# EAGLE board BlinkyBall-layout (EAGLE 6.2)
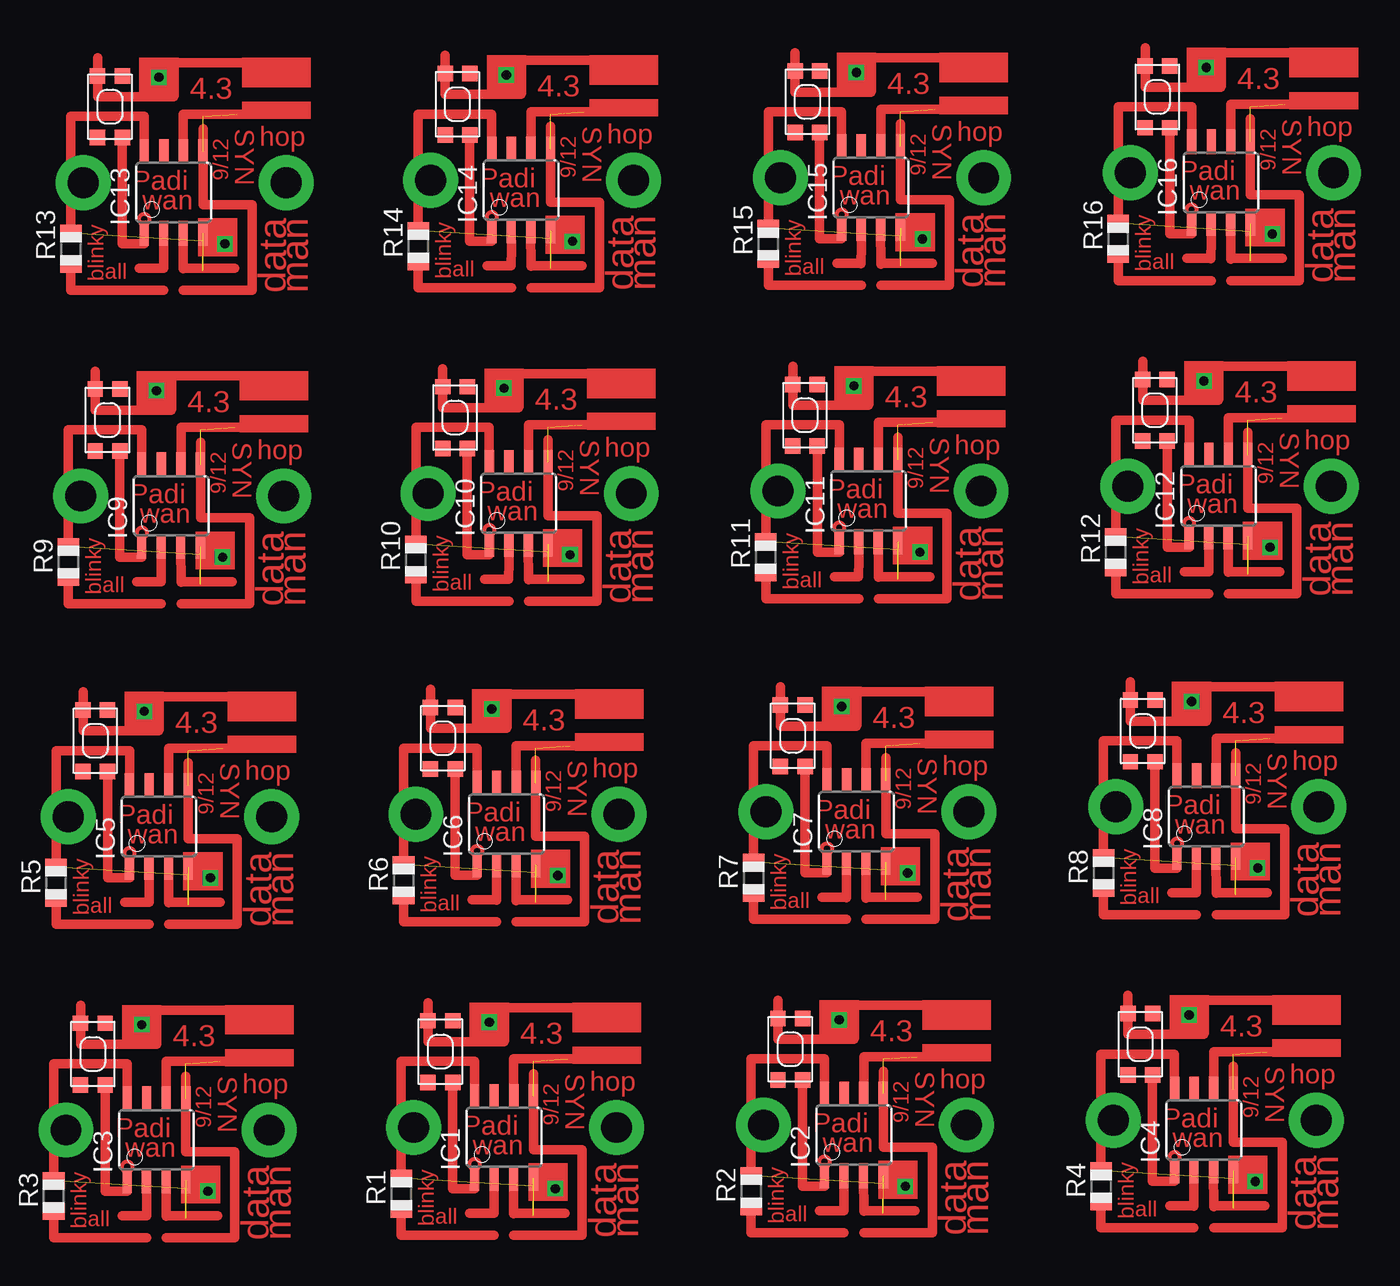
[diagram p0: board, top side]

No outline drawn. Coordinates in mm, seen from the top.
Copper layers (1*16): Top 0.035mm / dielectric 1.5mm / Bottom 0.035mm
Design rules: minimum track width 10mil, minimum drill 24mil, track to track 8mil, track to pad 8mil, pad to pad 8mil, via to via 8mil, smd to smd 8mil, copper to edge 40mil, drill to drill 8mil, minimum pad ring 10mil, minimum via ring 8mil, stop-mask expansion 4mil, vias tented up to drill 0mil, thermal gap 10mil

## Footprints (pad centres in the part's own frame; a part is rotated, then mirrored left to right if it is on the bottom)
KMR2 = smd 1 x 1: 1 2,0.8; 2 2,-0.8; 3 -2,0.8; 4 -2,-0.8
8S1 = smd 0.6 x 1.6: 1 -1.905,-2.654; 2 -0.645,-2.654; 3 0.625,-2.654; 4 1.895,-2.654; 5 1.905,2.654; 6 0.635,2.654; 7 -0.635,2.654; 8 -1.905,2.654
R0805 = smd 1.1 x 1.4: 1 -1,0; 2 1,0

## Placement (x,y rotation side)
E$1  [KMR2]  25.88,13.02 90 top
E$2  [KMR2]  3.33,12.86 90 top
E$3  [KMR2]  48.58,13.18 90 top
E$4  [KMR2]  71.28,13.49 90 top
E$5  [KMR2]  3.49,33.18 90 top
E$6  [KMR2]  26.04,33.34 90 top
E$7  [KMR2]  48.74,33.5 90 top
E$8  [KMR2]  71.44,33.81 90 top
E$9  [KMR2]  4.29,53.98 90 top
E$10  [KMR2]  26.83,54.13 90 top
E$11  [KMR2]  49.53,54.29 90 top
E$12  [KMR2]  72.23,54.61 90 top
E$13  [KMR2]  4.45,74.3 90 top
E$14  [KMR2]  26.99,74.45 90 top
E$15  [KMR2]  49.69,74.61 90 top
E$16  [KMR2]  72.39,74.93 90 top
IC1  TINY13-20SSU  [8S1]  30,7.46 0 top
IC2  TINY13-20SSU  [8S1]  52.7,7.62 0 top
IC3  TINY13-20SSU  [8S1]  7.46,7.3 0 top
IC4  TINY13-20SSU  [8S1]  75.41,7.94 0 top
IC5  TINY13-20SSU  [8S1]  7.62,27.62 0 top
IC6  TINY13-20SSU  [8S1]  30.16,27.78 0 top
IC7  TINY13-20SSU  [8S1]  52.86,27.94 0 top
IC8  TINY13-20SSU  [8S1]  75.56,28.26 0 top
IC9  TINY13-20SSU  [8S1]  8.41,48.42 0 top
IC10  TINY13-20SSU  [8S1]  30.96,48.58 0 top
IC11  TINY13-20SSU  [8S1]  53.66,48.74 0 top
IC12  TINY13-20SSU  [8S1]  76.36,49.05 0 top
IC13  TINY13-20SSU  [8S1]  8.57,68.74 0 top
IC14  TINY13-20SSU  [8S1]  31.11,68.9 0 top
IC15  TINY13-20SSU  [8S1]  53.82,69.06 0 top
IC16  TINY13-20SSU  [8S1]  76.52,69.37 0 top
R1  [R0805]  23.34,3.81 90 top
R2  [R0805]  46.04,3.97 90 top
R3  [R0805]  0.79,3.65 90 top
R4  [R0805]  68.74,4.29 90 top
R5  [R0805]  0.95,23.97 90 top
R6  [R0805]  23.5,24.13 90 top
R7  [R0805]  46.2,24.29 90 top
R8  [R0805]  68.9,24.61 90 top
R9  [R0805]  1.75,44.77 90 top
R10  [R0805]  24.29,44.93 90 top
R11  [R0805]  46.99,45.09 90 top
R12  [R0805]  69.69,45.4 90 top
R13  [R0805]  1.91,65.09 90 top
R14  [R0805]  24.45,65.25 90 top
R15  [R0805]  47.15,65.41 90 top
R16  [R0805]  69.85,65.72 90 top

## Library data of the parts
E$1-E$16 R1-R16 = adafruit
IC1-IC16 = atmel; MPN: ATTINY13-20SSU; OC_FARNELL: 1455133; OC_NEWARK: 58M3771

## Nets
N$1: IC1.5
N$2: IC1.2
N$3: IC1.3
N$4: R1.1
N$5: IC1.4 R1.2
N$6: IC2.5
N$7: IC2.2
N$8: IC2.3
N$9: R2.1
N$10: IC2.4 R2.2
N$11: IC4.5
N$12: IC4.2
N$13: IC4.3
N$14: R4.1
N$16: IC4.4 R4.2
N$17: IC5.5
N$18: IC5.2
N$19: IC5.3
N$20: R5.1
N$21: IC5.4 R5.2
N$22: IC6.5
N$23: IC6.2
N$24: IC6.3
N$25: IC3.5
N$26: IC3.2
N$27: IC3.3
N$28: R3.1
N$29: R6.1
N$30: IC3.4 R3.2
N$31: IC6.4 R6.2
N$32: IC7.5
N$33: IC7.2
N$34: IC7.3
N$35: R7.1
N$36: IC7.4 R7.2
N$37: IC8.5
N$38: IC8.2
N$40: IC8.3
N$41: R8.1
N$42: IC8.4 R8.2
N$43: IC9.5
N$44: IC9.2
N$45: IC9.3
N$46: R9.1
N$47: IC9.4 R9.2
N$48: IC10.5
N$49: IC10.2
N$50: IC10.3
N$51: R10.1
N$52: IC10.4 R10.2
N$53: IC11.5
N$54: IC11.2
N$55: IC11.3
N$56: R11.1
N$57: IC11.4 R11.2
N$58: IC12.5
N$59: IC12.2
N$60: IC12.3
N$61: R12.1
N$62: IC12.4 R12.2
N$63: IC13.5
N$64: IC13.2
N$65: IC13.3
N$66: R13.1
N$67: IC13.4 R13.2
N$68: IC14.5
N$69: IC14.2
N$70: IC14.3
N$71: R14.1
N$72: IC14.4 R14.2
N$73: IC15.5
N$74: IC15.2
N$75: IC15.3
N$76: R15.1
N$77: IC15.4 R15.2
N$78: IC16.5
N$79: IC16.2
N$80: IC16.3
N$81: R16.1
N$82: IC16.4 R16.2

## Tracks (layer width: path | path; a pad name or v marks a point on that pad's centre or on a via)
N$1  (2 unrouted)
N$2
  Top 0.61: IC1.2 29.37,3.65 29.36,2.53
N$3
  Top 0.406: IC1.3 30.63,4.71
  Top 0.61: 30.63,4.71 30.64,2.5
N$4
  Top 0.61: 29.37,1.11 23.34,1.11 R1.1
N$5  (3 unrouted)
  Top 0.406: IC1.4 31.9,4.92
  Top 0.61: 31.9,4.92 31.91,4.92 31.91,3.68
N$6  (2 unrouted)
N$7
  Top 0.61: IC2.2 52.07,3.81 52.06,2.69
N$8
  Top 0.406: IC2.3 53.33,4.87
  Top 0.61: 53.33,4.87 53.34,2.65
N$9
  Top 0.61: 52.07,1.27 46.04,1.27 R2.1
N$10  (3 unrouted)
  Top 0.406: IC2.4 54.6,5.08
  Top 0.61: 54.6,5.08 54.61,5.08 54.61,3.84
N$11  (2 unrouted)
N$12
  Top 0.61: IC4.2 74.77,4.13 74.76,3.01
N$13
  Top 0.406: IC4.3 76.03,5.18
  Top 0.61: 76.03,5.18 76.04,2.97
N$14
  Top 0.61: 74.77,1.59 68.74,1.59 R4.1
N$16  (3 unrouted)
  Top 0.406: IC4.4 77.3,5.4
  Top 0.61: 77.3,5.4 77.31,5.4 77.31,4.16
N$17  (2 unrouted)
N$18
  Top 0.61: IC5.2 6.99,23.81 6.97,22.69
N$19
  Top 0.406: IC5.3 8.24,24.87
  Top 0.61: 8.24,24.87 8.26,22.66
N$20
  Top 0.61: 6.99,21.27 0.95,21.27 R5.1
N$21  (3 unrouted)
  Top 0.406: IC5.4 9.52,25.08
  Top 0.61: 9.52,25.08 9.53,25.08 9.53,23.84
N$22  (2 unrouted)
N$23
  Top 0.61: IC6.2 29.53,23.97 29.52,22.85
N$24
  Top 0.406: IC6.3 30.79,25.03
  Top 0.61: 30.79,25.03 30.8,22.82
N$25  (2 unrouted)
N$26
  Top 0.61: IC3.2 6.83,3.49 6.82,2.37
N$27
  Top 0.406: IC3.3 8.09,4.55
  Top 0.61: 8.09,4.55 8.1,2.34
N$28
  Top 0.61: 6.83,0.95 0.79,0.95 R3.1
N$29
  Top 0.61: 29.53,21.43 23.5,21.43 R6.1
N$30  (3 unrouted)
  Top 0.406: IC3.4 9.36,4.76
  Top 0.61: 9.36,4.76 9.37,4.76 9.37,3.52
N$31  (3 unrouted)
  Top 0.406: IC6.4 32.06,25.24
  Top 0.61: 32.06,25.24 32.07,25.24 32.07,24
N$32  (2 unrouted)
N$33
  Top 0.61: IC7.2 52.23,24.13 52.22,23.01
N$34
  Top 0.406: IC7.3 53.49,25.19
  Top 0.61: 53.49,25.19 53.5,22.98
N$35
  Top 0.61: 52.23,21.59 46.2,21.59 R7.1
N$36  (3 unrouted)
  Top 0.406: IC7.4 54.76,25.4
  Top 0.61: 54.76,25.4 54.77,25.4 54.77,24.16
N$37  (2 unrouted)
N$38
  Top 0.61: IC8.2 74.93,24.45 74.92,23.33
N$40
  Top 0.406: IC8.3 76.19,25.5
  Top 0.61: 76.19,25.5 76.2,23.29
N$41
  Top 0.61: 74.93,21.91 68.9,21.91 R8.1
N$42  (3 unrouted)
  Top 0.406: IC8.4 77.46,25.72
  Top 0.61: 77.46,25.72 77.47,25.72 77.47,24.48
N$43  (2 unrouted)
N$44
  Top 0.61: IC9.2 7.78,44.61 7.77,43.49
N$45
  Top 0.406: IC9.3 9.04,45.67
  Top 0.61: 9.04,45.67 9.05,43.45
N$46
  Top 0.61: 7.78,42.07 1.75,42.07 R9.1
N$47  (3 unrouted)
  Top 0.406: IC9.4 10.31,45.88
  Top 0.61: 10.31,45.88 10.32,45.88 10.32,44.64
N$48  (2 unrouted)
N$49
  Top 0.61: IC10.2 30.32,44.77 30.31,43.65
N$50
  Top 0.406: IC10.3 31.58,45.83
  Top 0.61: 31.58,45.83 31.59,43.61
N$51
  Top 0.61: 30.32,42.23 24.29,42.23 R10.1
N$52  (3 unrouted)
  Top 0.406: IC10.4 32.85,46.04
  Top 0.61: 32.85,46.04 32.86,46.04 32.86,44.8
N$53  (2 unrouted)
N$54
  Top 0.61: IC11.2 53.02,44.93 53.01,43.8
N$55
  Top 0.406: IC11.3 54.28,45.98
  Top 0.61: 54.28,45.98 54.29,43.77
N$56
  Top 0.61: 53.02,42.39 46.99,42.39 R11.1
N$57  (3 unrouted)
  Top 0.406: IC11.4 55.55,46.2
  Top 0.61: 55.55,46.2 55.56,46.2 55.56,44.96
N$58  (2 unrouted)
N$59
  Top 0.61: IC12.2 75.72,45.24 75.71,44.12
N$60
  Top 0.406: IC12.3 76.98,46.3
  Top 0.61: 76.98,46.3 76.99,44.09
N$61
  Top 0.61: 75.72,42.7 69.69,42.7 R12.1
N$62  (3 unrouted)
  Top 0.406: IC12.4 78.25,46.51
  Top 0.61: 78.25,46.51 78.26,46.51 78.26,45.28
N$63  (2 unrouted)
N$64
  Top 0.61: IC13.2 7.94,64.93 7.93,63.81
N$65
  Top 0.406: IC13.3 9.2,65.99
  Top 0.61: 9.2,65.99 9.21,63.77
N$66
  Top 0.61: 7.94,62.39 1.91,62.39 R13.1
N$67  (3 unrouted)
  Top 0.406: IC13.4 10.47,66.2
  Top 0.61: 10.47,66.2 10.48,66.2 10.48,64.96
N$68  (2 unrouted)
N$69
  Top 0.61: IC14.2 30.48,65.09 30.47,63.97
N$70
  Top 0.406: IC14.3 31.74,66.14
  Top 0.61: 31.74,66.14 31.75,63.93
N$71
  Top 0.61: 30.48,62.55 24.45,62.55 R14.1
N$72  (3 unrouted)
  Top 0.406: IC14.4 33.01,66.36
  Top 0.61: 33.01,66.36 33.02,66.36 33.02,65.12
N$73  (2 unrouted)
N$74
  Top 0.61: IC15.2 53.18,65.25 53.17,64.12
N$75
  Top 0.406: IC15.3 54.44,66.3
  Top 0.61: 54.44,66.3 54.45,64.09
N$76
  Top 0.61: 53.18,62.71 47.15,62.71 R15.1
N$77  (3 unrouted)
  Top 0.406: IC15.4 55.71,66.52
  Top 0.61: 55.71,66.52 55.72,66.52 55.72,65.28
N$78  (2 unrouted)
N$79
  Top 0.61: IC16.2 75.88,65.56 75.87,64.44
N$80
  Top 0.406: IC16.3 77.14,66.62
  Top 0.61: 77.14,66.62 77.15,64.41
N$81
  Top 0.61: 75.88,63.02 69.85,63.02 R16.1
N$82  (3 unrouted)
  Top 0.406: IC16.4 78.41,66.83
  Top 0.61: 78.41,66.83 78.42,66.83 78.42,65.6
S$1
  Top 0.61: 7.46,13.49 2.54,13.49 2.54,16.03
S$2
  Top 0.61: 8.1,2.38 11.43,2.38 | 6.83,15.72 12.22,15.72
S$3  (via drill 2 pad 3.56)
  other vias: 14.76,7.94 1.59,7.94
S$4
  Top 0.61: 0.79,9.37 0.79,12.22 5.56,12.22 5.56,9.84
S$5
  Top 0.61: 8.1,12.38 12.38,12.38
S$6
  Top 0.61: 8.1,0.95 9.53,0.95
S$7
  Top 0.61: 4.13,10.79 4.13,3.97 5.56,3.97
S$8
  Top 0.61: 6.67,2.38 5.24,2.38
S$9  (via drill 0.6)
  other vias: 6.51,14.76
S$10
  Top 0.61: 0.79,4.76 0.79,6.51
S$11
  Top 0.61: 9.37,11.43 9.37,6.51 12.54,6.51 12.54,0.95 8.1,0.95
S$12
  Top 0.61: 8.1,10.32 8.1,12.22
S$13
  Top 0.61: 30.64,2.54 33.97,2.54 | 29.37,15.88 34.77,15.88
S$14  (via drill 0.6)
  other vias: 10.79,3.97
S$15  (via drill 2 pad 3.56)
  other vias: 37.31,8.1 24.13,8.1
S$16
  Top 0.61: 23.34,9.53 23.34,12.38 28.1,12.38 28.1,10
S$17
  Top 0.61: 26.67,10.95 26.67,4.13 28.1,4.13
S$18
  Top 0.61: 23.34,4.92 23.34,6.67
S$19
  Top 0.61: 31.91,11.59 31.91,6.67 35.08,6.67 35.08,1.11 30.64,1.11
S$20
  Top 0.61: 30.64,10.48 30.64,12.38
S$21
  Top 0.61: 29.21,2.54 27.78,2.54
S$22
  Top 0.61: 30,13.65 25.08,13.65 25.08,16.19
S$23
  Top 0.61: 30.64,12.54 34.92,12.54
S$24
  Top 0.61: 30.64,1.11 32.07,1.11
S$25  (via drill 0.6)
  other vias: 29.05,14.92
S$26  (via drill 0.6)
  other vias: 33.34,4.13
S$27
  Top 0.61: 53.34,2.7 56.67,2.7 | 52.07,16.03 57.47,16.03
S$28  (via drill 2 pad 3.56)
  other vias: 60.01,8.26 46.83,8.26
S$29
  Top 0.61: 46.04,9.68 46.04,12.54 50.8,12.54 50.8,10.16
S$30
  Top 0.61: 49.37,11.11 49.37,4.29 50.8,4.29
S$31
  Top 0.61: 46.04,5.08 46.04,6.83
S$32
  Top 0.61: 54.61,11.75 54.61,6.83 57.78,6.83 57.78,1.27 53.34,1.27
S$33
  Top 0.61: 53.34,10.64 53.34,12.54
S$34
  Top 0.61: 51.91,2.7 50.48,2.7
S$35
  Top 0.61: 52.7,13.81 47.78,13.81 47.78,16.35
S$36
  Top 0.61: 53.34,12.7 57.63,12.7
S$37
  Top 0.61: 53.34,1.27 54.77,1.27
S$38  (via drill 0.6)
  other vias: 51.75,15.08
S$39  (via drill 0.6)
  other vias: 56.04,4.29
S$40
  Top 0.61: 76.04,3.02 79.38,3.02 | 74.77,16.35 80.17,16.35
S$41  (via drill 2 pad 3.56)
  other vias: 82.71,8.57 69.53,8.57
S$42
  Top 0.61: 68.74,10 68.74,12.86 73.5,12.86 73.5,10.48
S$43
  Top 0.61: 72.07,11.43 72.07,4.6 73.5,4.6
S$44
  Top 0.61: 68.74,5.4 68.74,7.14
S$45
  Top 0.61: 77.31,12.06 77.31,7.14 80.49,7.14 80.49,1.59 76.04,1.59
S$46
  Top 0.61: 76.04,10.95 76.04,12.86
S$47
  Top 0.61: 74.61,3.02 73.18,3.02
S$48
  Top 0.61: 75.41,14.13 70.48,14.13 70.48,16.67
S$49
  Top 0.61: 76.04,13.02 80.33,13.02
S$50
  Top 0.61: 76.04,1.59 77.47,1.59
S$51  (via drill 0.6)
  other vias: 74.45,15.4
S$52  (via drill 0.6)
  other vias: 78.74,4.6
S$53
  Top 0.61: 8.26,22.7 11.59,22.7 | 6.99,36.04 12.38,36.04
S$54  (via drill 2 pad 3.56)
  other vias: 14.92,28.26 1.75,28.26
S$55
  Top 0.61: 0.95,29.69 0.95,32.54 5.71,32.54 5.71,30.16
S$56
  Top 0.61: 4.29,31.11 4.29,24.29 5.71,24.29
S$57
  Top 0.61: 0.95,25.08 0.95,26.83
S$58
  Top 0.61: 9.53,31.75 9.53,26.83 12.7,26.83 12.7,21.27 8.26,21.27
S$59
  Top 0.61: 8.26,30.64 8.26,32.54
S$60
  Top 0.61: 6.83,22.7 5.4,22.7
S$61
  Top 0.61: 7.62,33.81 2.7,33.81 2.7,36.35
S$62
  Top 0.61: 8.26,32.7 12.54,32.7
S$63
  Top 0.61: 8.26,21.27 9.68,21.27
S$64  (via drill 0.6)
  other vias: 6.67,35.08
S$65  (via drill 0.6)
  other vias: 10.95,24.29
S$66
  Top 0.61: 30.8,22.86 34.13,22.86 | 29.53,36.2 34.92,36.2
S$67  (via drill 2 pad 3.56)
  other vias: 37.47,28.42 24.29,28.42
S$68
  Top 0.61: 23.5,29.84 23.5,32.7 28.26,32.7 28.26,30.32
S$69
  Top 0.61: 26.83,31.27 26.83,24.45 28.26,24.45
S$70
  Top 0.61: 23.5,25.24 23.5,26.99
S$71
  Top 0.61: 32.07,31.91 32.07,26.99 35.24,26.99 35.24,21.43 30.8,21.43
S$72
  Top 0.61: 30.8,30.8 30.8,32.7
S$73
  Top 0.61: 29.37,22.86 27.94,22.86
S$74
  Top 0.61: 30.16,33.97 25.24,33.97 25.24,36.51
S$75
  Top 0.61: 30.8,32.86 35.08,32.86
S$76
  Top 0.61: 30.8,21.43 32.23,21.43
S$77  (via drill 0.6)
  other vias: 29.21,35.24
S$78  (via drill 0.6)
  other vias: 33.5,24.45
S$79
  Top 0.61: 53.5,23.02 56.83,23.02 | 52.23,36.35 57.63,36.35
S$80  (via drill 2 pad 3.56)
  other vias: 60.17,28.57 46.99,28.57
S$81
  Top 0.61: 46.2,30 46.2,32.86 50.96,32.86 50.96,30.48
S$82
  Top 0.61: 49.53,31.43 49.53,24.61 50.96,24.61
S$83
  Top 0.61: 46.2,25.4 46.2,27.15
S$84
  Top 0.61: 54.77,32.07 54.77,27.15 57.94,27.15 57.94,21.59 53.5,21.59
S$85
  Top 0.61: 53.5,30.96 53.5,32.86
S$86
  Top 0.61: 52.07,23.02 50.64,23.02
S$87
  Top 0.61: 52.86,34.13 47.94,34.13 47.94,36.67
S$88
  Top 0.61: 53.5,33.02 57.78,33.02
S$89
  Top 0.61: 53.5,21.59 54.93,21.59
S$90  (via drill 0.6)
  other vias: 51.91,35.4
S$91  (via drill 0.6)
  other vias: 56.2,24.61
S$92
  Top 0.61: 76.2,23.34 79.53,23.34 | 74.93,36.67 80.33,36.67
S$93  (via drill 2 pad 3.56)
  other vias: 82.87,28.89 69.69,28.89
S$94
  Top 0.61: 68.9,30.32 68.9,33.18 73.66,33.18 73.66,30.8
S$95
  Top 0.61: 72.23,31.75 72.23,24.92 73.66,24.92
S$96
  Top 0.61: 68.9,25.72 68.9,27.46
S$97
  Top 0.61: 77.47,32.38 77.47,27.46 80.64,27.46 80.64,21.91 76.2,21.91
S$98
  Top 0.61: 76.2,31.27 76.2,33.18
S$99
  Top 0.61: 74.77,23.34 73.34,23.34
S$100
  Top 0.61: 75.56,34.45 70.64,34.45 70.64,36.99
S$101
  Top 0.61: 76.2,33.34 80.49,33.34
S$102
  Top 0.61: 76.2,21.91 77.63,21.91
S$103  (via drill 0.6)
  other vias: 74.61,35.72
S$104  (via drill 0.6)
  other vias: 78.9,24.92
S$105
  Top 0.61: 9.05,43.5 12.38,43.5 | 7.78,56.83 13.18,56.83
S$106  (via drill 2 pad 3.56)
  other vias: 15.72,49.05 2.54,49.05
S$107
  Top 0.61: 1.75,50.48 1.75,53.34 6.51,53.34 6.51,50.96
S$108
  Top 0.61: 5.08,51.91 5.08,45.09 6.51,45.09
S$109
  Top 0.61: 1.75,45.88 1.75,47.62
S$110
  Top 0.61: 10.32,52.55 10.32,47.62 13.49,47.62 13.49,42.07 9.05,42.07
S$111
  Top 0.61: 9.05,51.44 9.05,53.34
S$112
  Top 0.61: 7.62,43.5 6.19,43.5
S$113
  Top 0.61: 8.41,54.61 3.49,54.61 3.49,57.15
S$114
  Top 0.61: 9.05,53.5 13.34,53.5
S$115
  Top 0.61: 9.05,42.07 10.48,42.07
S$116  (via drill 0.6)
  other vias: 7.46,55.88
S$117  (via drill 0.6)
  other vias: 11.75,45.09
S$118
  Top 0.61: 31.59,43.66 34.92,43.66 | 30.32,56.99 35.72,56.99
S$119  (via drill 2 pad 3.56)
  other vias: 38.26,49.21 25.08,49.21
S$120
  Top 0.61: 24.29,50.64 24.29,53.5 29.05,53.5 29.05,51.12
S$121
  Top 0.61: 27.62,52.07 27.62,45.24 29.05,45.24
S$122
  Top 0.61: 24.29,46.04 24.29,47.78
S$123
  Top 0.61: 32.86,52.7 32.86,47.78 36.04,47.78 36.04,42.23 31.59,42.23
S$124
  Top 0.61: 31.59,51.59 31.59,53.5
S$125
  Top 0.61: 30.16,43.66 28.73,43.66
S$126
  Top 0.61: 30.96,54.77 26.04,54.77 26.04,57.31
S$127
  Top 0.61: 31.59,53.66 35.88,53.66
S$128
  Top 0.61: 31.59,42.23 33.02,42.23
S$129  (via drill 0.6)
  other vias: 30,56.04
S$130  (via drill 0.6)
  other vias: 34.29,45.24
S$131
  Top 0.61: 54.29,43.81 57.63,43.81 | 53.02,57.15 58.42,57.15
S$132  (via drill 2 pad 3.56)
  other vias: 60.96,49.37 47.78,49.37
S$133
  Top 0.61: 46.99,50.8 46.99,53.66 51.75,53.66 51.75,51.28
S$134
  Top 0.61: 50.32,52.23 50.32,45.4 51.75,45.4
S$135
  Top 0.61: 46.99,46.2 46.99,47.94
S$136
  Top 0.61: 55.56,52.86 55.56,47.94 58.74,47.94 58.74,42.39 54.29,42.39
S$137
  Top 0.61: 54.29,51.75 54.29,53.66
S$138
  Top 0.61: 52.86,43.81 51.44,43.81
S$139
  Top 0.61: 53.66,54.93 48.74,54.93 48.74,57.47
S$140
  Top 0.61: 54.29,53.82 58.58,53.82
S$141
  Top 0.61: 54.29,42.39 55.72,42.39
S$142  (via drill 0.6)
  other vias: 52.7,56.2
S$143  (via drill 0.6)
  other vias: 56.99,45.4
S$144
  Top 0.61: 76.99,44.13 80.33,44.13 | 75.72,57.47 81.12,57.47
S$145  (via drill 2 pad 3.56)
  other vias: 83.66,49.69 70.48,49.69
S$146
  Top 0.61: 69.69,51.12 69.69,53.98 74.45,53.98 74.45,51.59
S$147
  Top 0.61: 73.03,52.55 73.03,45.72 74.45,45.72
S$148
  Top 0.61: 69.69,46.51 69.69,48.26
S$149
  Top 0.61: 78.26,53.18 78.26,48.26 81.44,48.26 81.44,42.7 76.99,42.7
S$150
  Top 0.61: 76.99,52.07 76.99,53.98
S$151
  Top 0.61: 75.56,44.13 74.14,44.13
S$152
  Top 0.61: 76.36,55.24 71.44,55.24 71.44,57.78
S$153
  Top 0.61: 76.99,54.13 81.28,54.13
S$154
  Top 0.61: 76.99,42.7 78.42,42.7
S$155  (via drill 0.6)
  other vias: 75.41,56.52
S$156  (via drill 0.6)
  other vias: 79.69,45.72
S$157
  Top 0.61: 9.21,63.82 12.54,63.82 | 7.94,77.15 13.34,77.15
S$158  (via drill 2 pad 3.56)
  other vias: 15.88,69.37 2.7,69.37
S$159
  Top 0.61: 1.91,70.8 1.91,73.66 6.67,73.66 6.67,71.28
S$160
  Top 0.61: 5.24,72.23 5.24,65.41 6.67,65.41
S$161
  Top 0.61: 1.91,66.2 1.91,67.94
S$162
  Top 0.61: 10.48,72.87 10.48,67.94 13.65,67.94 13.65,62.39 9.21,62.39
S$163
  Top 0.61: 9.21,71.75 9.21,73.66
S$164
  Top 0.61: 7.78,63.82 6.35,63.82
S$165
  Top 0.61: 8.57,74.93 3.65,74.93 3.65,77.47
S$166
  Top 0.61: 9.21,73.82 13.49,73.82
S$167
  Top 0.61: 9.21,62.39 10.64,62.39
S$168  (via drill 0.6)
  other vias: 7.62,76.2
S$169  (via drill 0.6)
  other vias: 11.91,65.41
S$170
  Top 0.61: 31.75,63.98 35.08,63.98 | 30.48,77.31 35.88,77.31
S$171  (via drill 2 pad 3.56)
  other vias: 38.42,69.53 25.24,69.53
S$172
  Top 0.61: 24.45,70.96 24.45,73.82 29.21,73.82 29.21,71.44
S$173
  Top 0.61: 27.78,72.39 27.78,65.56 29.21,65.56
S$174
  Top 0.61: 24.45,66.36 24.45,68.1
S$175
  Top 0.61: 33.02,73.03 33.02,68.1 36.2,68.1 36.2,62.55 31.75,62.55
S$176
  Top 0.61: 31.75,71.91 31.75,73.82
S$177
  Top 0.61: 30.32,63.98 28.89,63.98
S$178
  Top 0.61: 31.11,75.09 26.19,75.09 26.19,77.63
S$179
  Top 0.61: 31.75,73.98 36.04,73.98
S$180
  Top 0.61: 31.75,62.55 33.18,62.55
S$181  (via drill 0.6)
  other vias: 30.16,76.36
S$182  (via drill 0.6)
  other vias: 34.45,65.56
S$183
  Top 0.61: 54.45,64.14 57.78,64.14 | 53.18,77.47 58.58,77.47
S$184  (via drill 2 pad 3.56)
  other vias: 61.12,69.69 47.94,69.69
S$185
  Top 0.61: 47.15,71.12 47.15,73.98 51.91,73.98 51.91,71.6
S$186
  Top 0.61: 50.48,72.55 50.48,65.72 51.91,65.72
S$187
  Top 0.61: 47.15,66.52 47.15,68.26
S$188
  Top 0.61: 55.72,73.18 55.72,68.26 58.9,68.26 58.9,62.71 54.45,62.71
S$189
  Top 0.61: 54.45,72.07 54.45,73.98
S$190
  Top 0.61: 53.02,64.14 51.59,64.14
S$191
  Top 0.61: 53.82,75.25 48.9,75.25 48.9,77.79
S$192
  Top 0.61: 54.45,74.14 58.74,74.14
S$193
  Top 0.61: 54.45,62.71 55.88,62.71
S$194  (via drill 0.6)
  other vias: 52.86,76.52
S$195  (via drill 0.6)
  other vias: 57.15,65.72
S$196
  Top 0.61: 77.15,64.45 80.49,64.45 | 75.88,77.79 81.28,77.79
S$197  (via drill 2 pad 3.56)
  other vias: 83.82,70.01 70.64,70.01
S$198
  Top 0.61: 69.85,71.44 69.85,74.3 74.61,74.3 74.61,71.91
S$199
  Top 0.61: 73.18,72.87 73.18,66.04 74.61,66.04
S$200
  Top 0.61: 69.85,66.83 69.85,68.58
S$201
  Top 0.61: 78.42,73.5 78.42,68.58 81.6,68.58 81.6,63.02 77.15,63.02
S$202
  Top 0.61: 77.15,72.39 77.15,74.3
S$203
  Top 0.61: 75.72,64.45 74.3,64.45
S$204
  Top 0.61: 76.52,75.56 71.6,75.56 71.6,78.11
S$205
  Top 0.61: 77.15,74.45 81.44,74.45
S$206
  Top 0.61: 77.15,63.02 78.58,63.02
S$207  (via drill 0.6)
  other vias: 75.56,76.83
S$208  (via drill 0.6)
  other vias: 79.85,66.04
(copper drawn outside any net)
  shapes: Top area x64, Top circle x16

## Text on the board
Top: 4.3 | 4.3 | 4.3 | 4.3 | SYN | SYN | SYN | 9/12 | SYN | 9/12 | 9/12 | hop | 9/12 | hop | hop | hop | Padi | Padi | Padi | Padi | wan | wan | wan | wan | blinky | blinky | blinky | blinky | all | all | all | all | data | man | data | man | data | man | data | man | 4.3 | 4.3 | 4.3 | 4.3 | SYN | SYN | SYN | 9/12 | SYN | 9/12 | 9/12 | hop | 9/12 | hop | hop | hop | Padi | Padi | Padi | Padi | wan | wan | wan | wan | blinky | blinky | blinky | blinky | all | all | all | all | data | man | data | man | data | man | data | man | 4.3 | 4.3 | 4.3 | 4.3 | SYN | SYN | SYN | 9/12 | SYN | 9/12 | hop | 9/12 | hop | 9/12 | hop | hop | Padi | Padi | Padi | Padi | wan | wan | wan | wan | blinky | blinky | blinky | blinky | all | all | all | all | data | man | data | man | data | man | data | man | 4.3 | 4.3 | 4.3 | 4.3 | SYN | SYN | SYN | 9/12 | SYN | 9/12 | 9/12 | hop | 9/12 | hop | hop | hop | Padi | Padi | Padi | Padi | wan | wan | wan | wan | blinky | blinky | blinky | blinky | all | all | all | all | data | man | data | man | data | man | data | man